# Altium PCB UST001_UUTurbidityControl.PcbDoc
Units mm, origin at the board's own origin, x right, y up, seen from the top; angles counter-clockwise.
Board outline 25 x 40 mm, 4 copper layers (Top Layer, PWR, GND, Bottom Layer), stack 1.449 mm thick; 69 components, 41 nets, 206 pads, 110 vias.
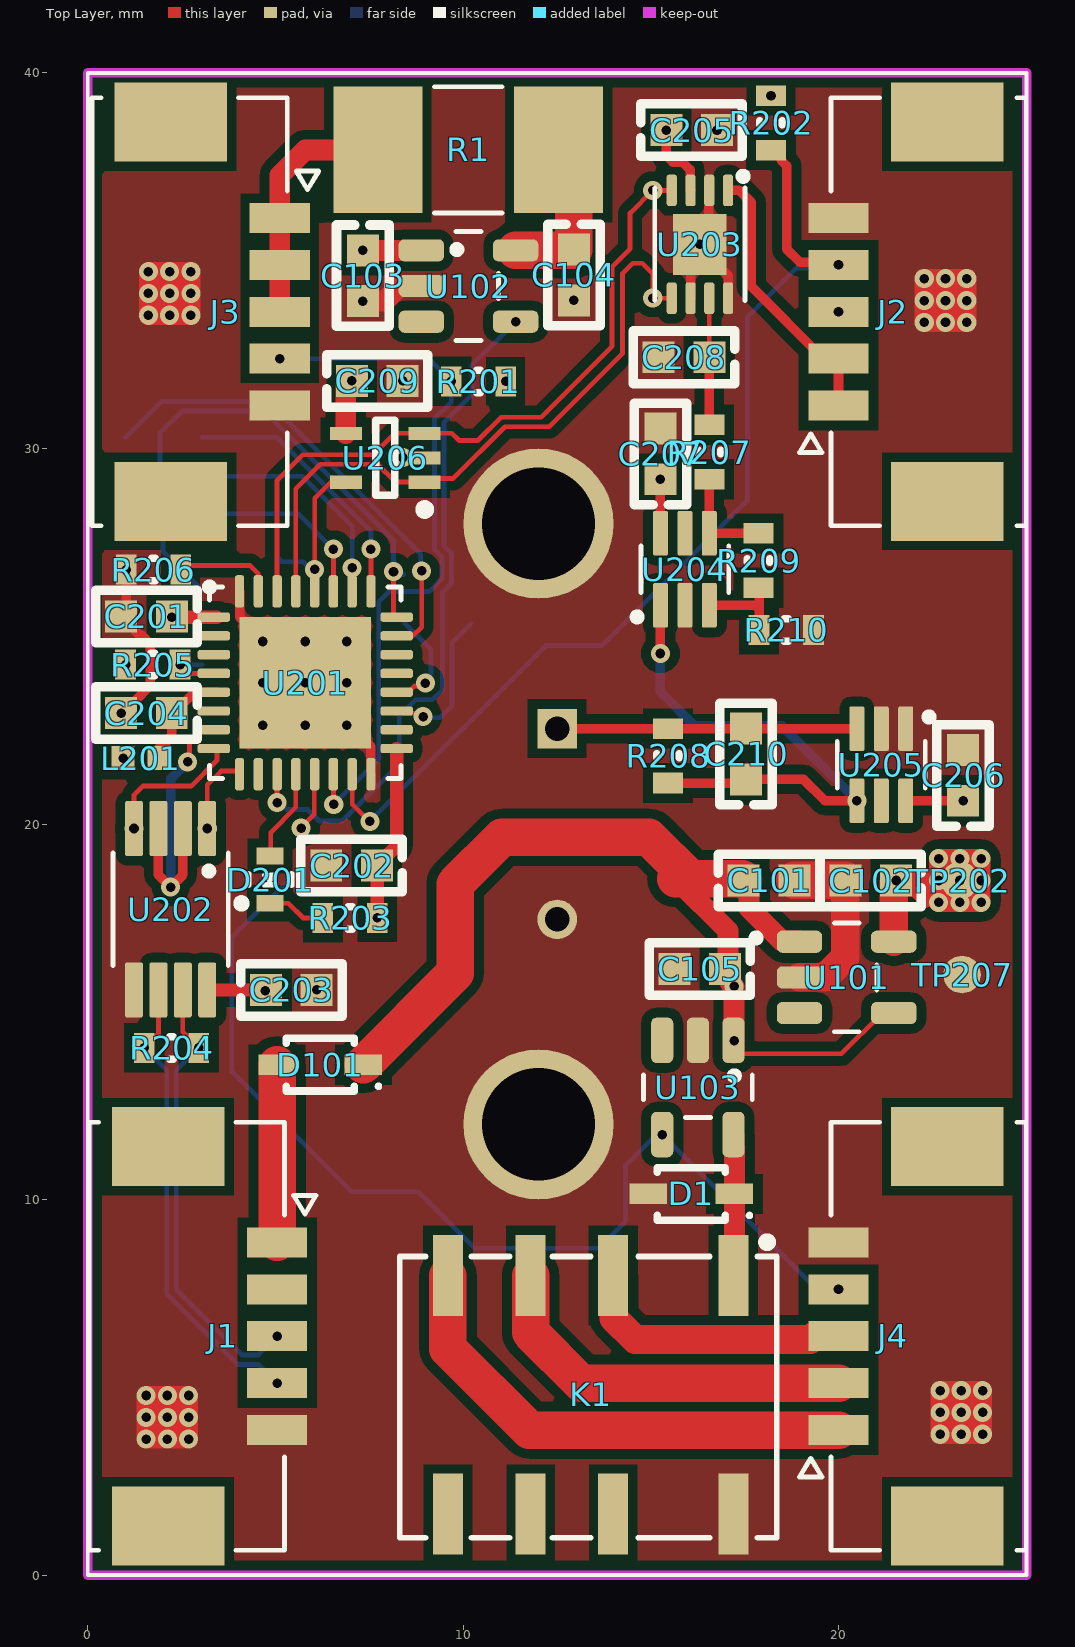
[diagram p0: Top Layer view]
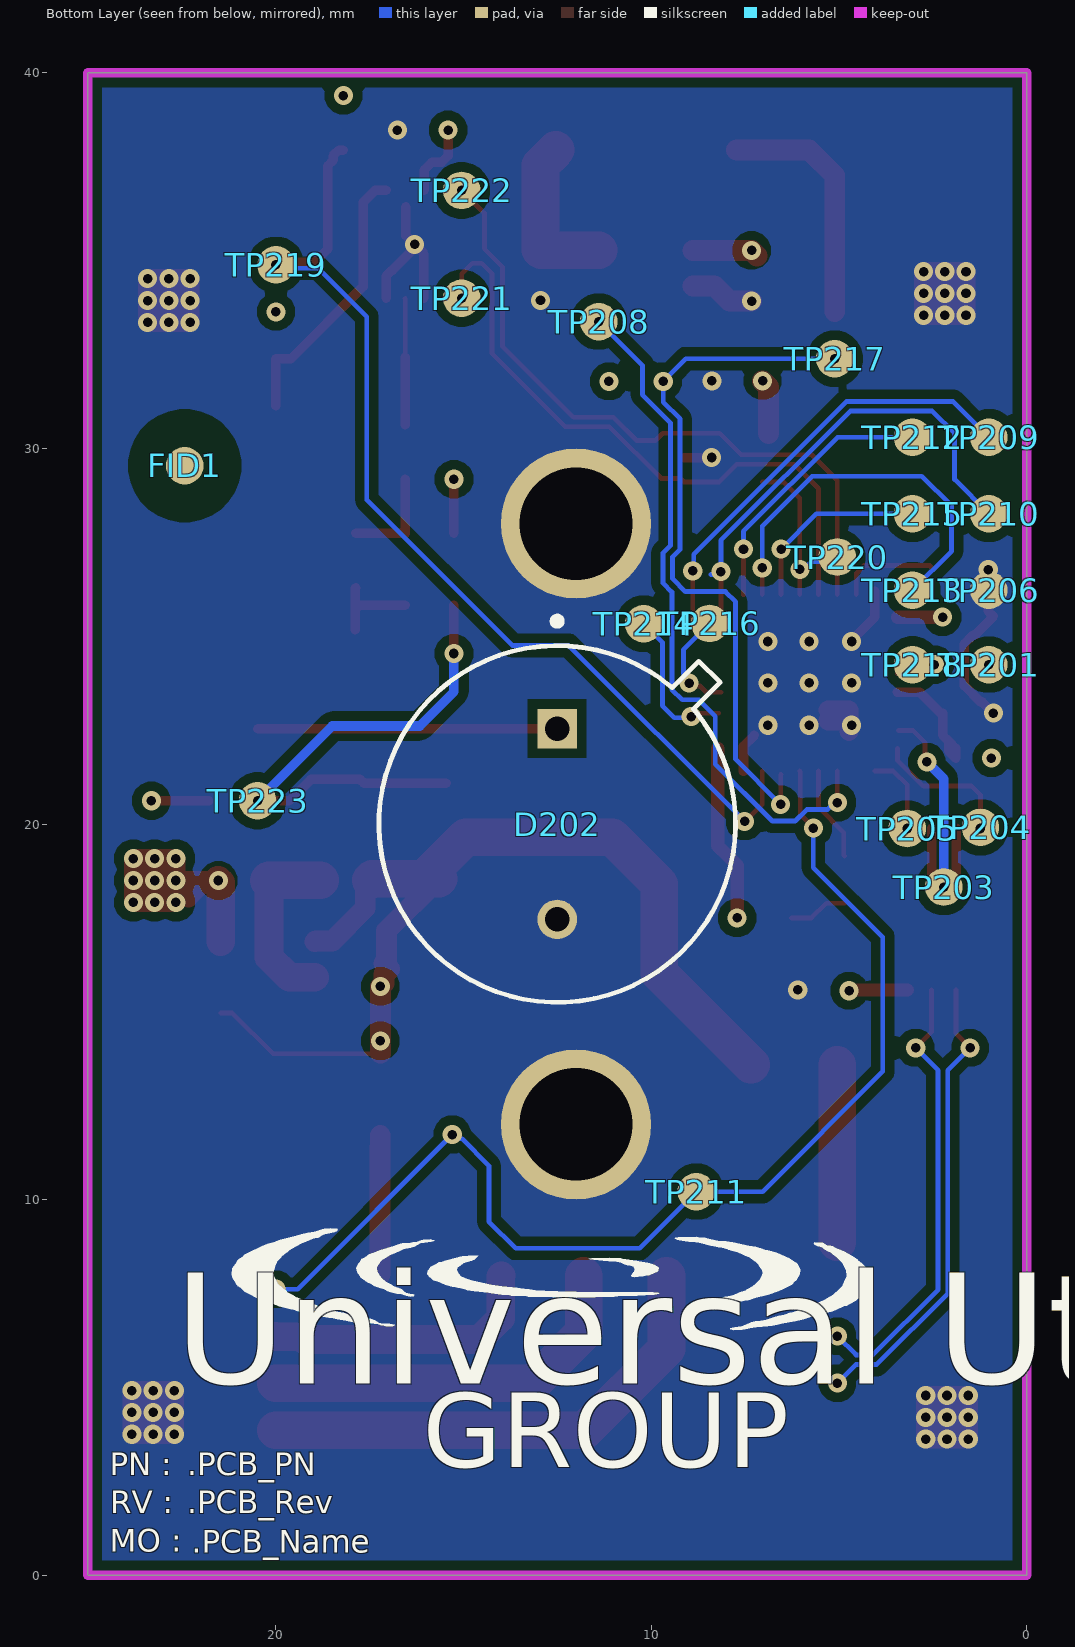
[diagram p1: Bottom Layer view, seen from below]
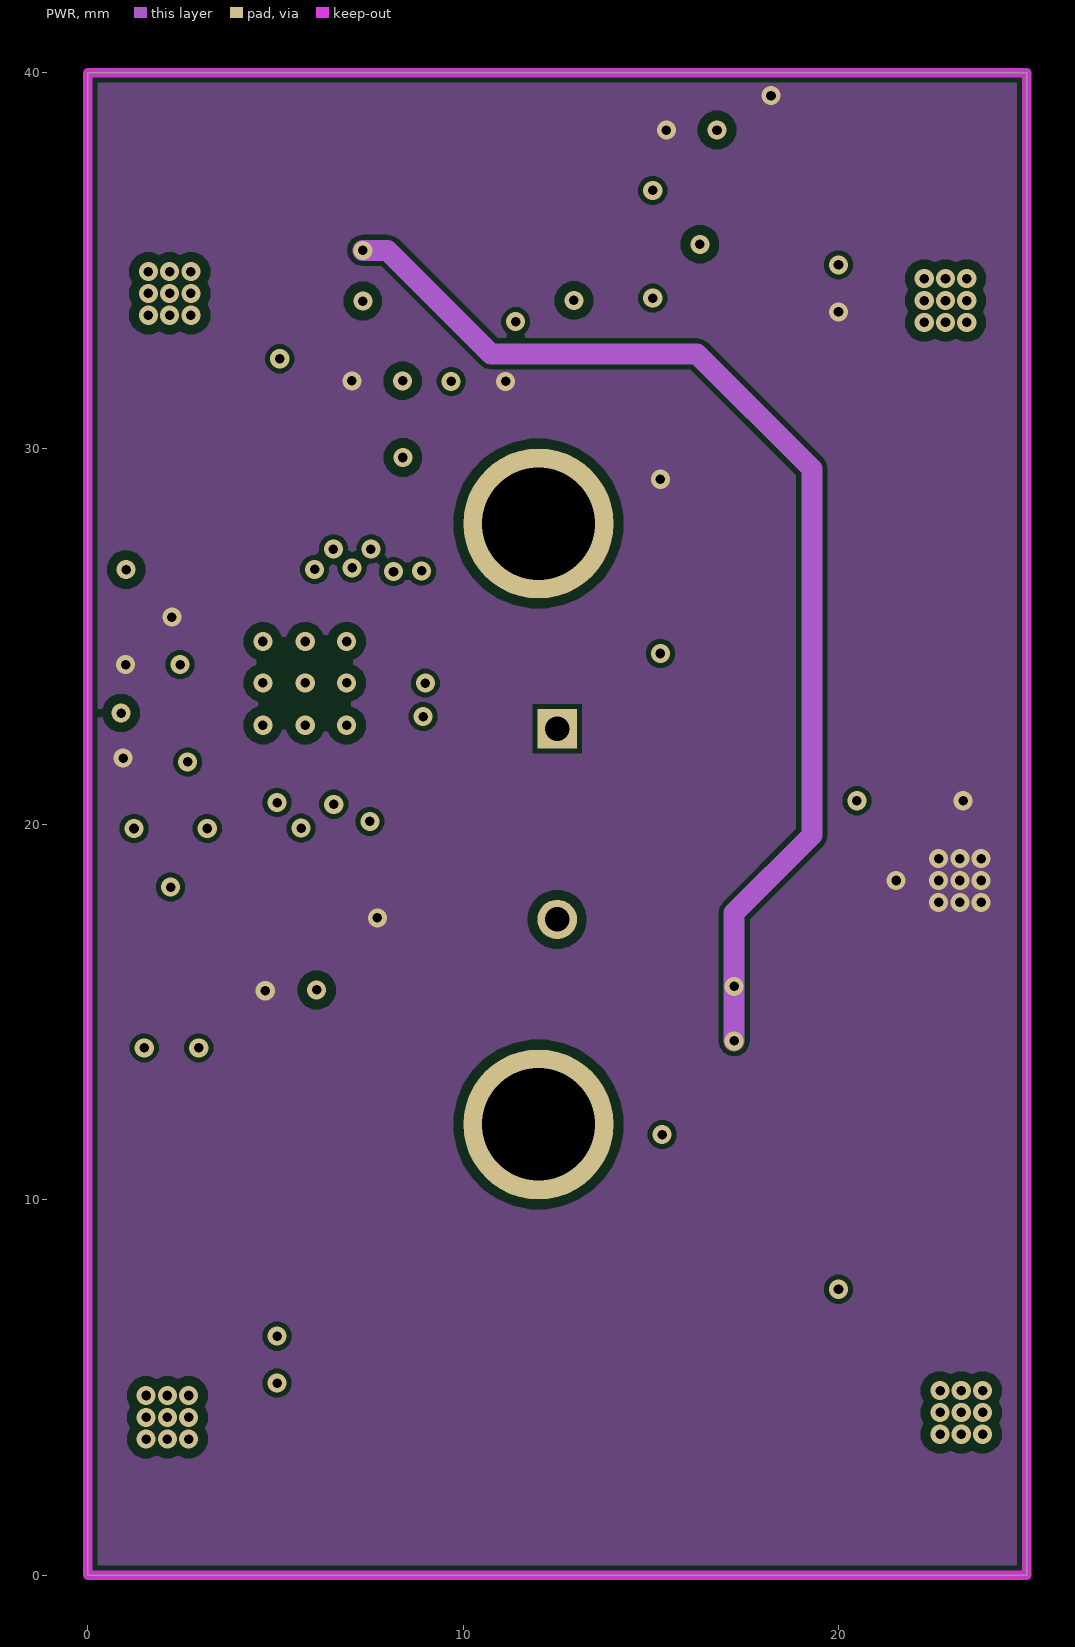
[diagram p2: PWR]
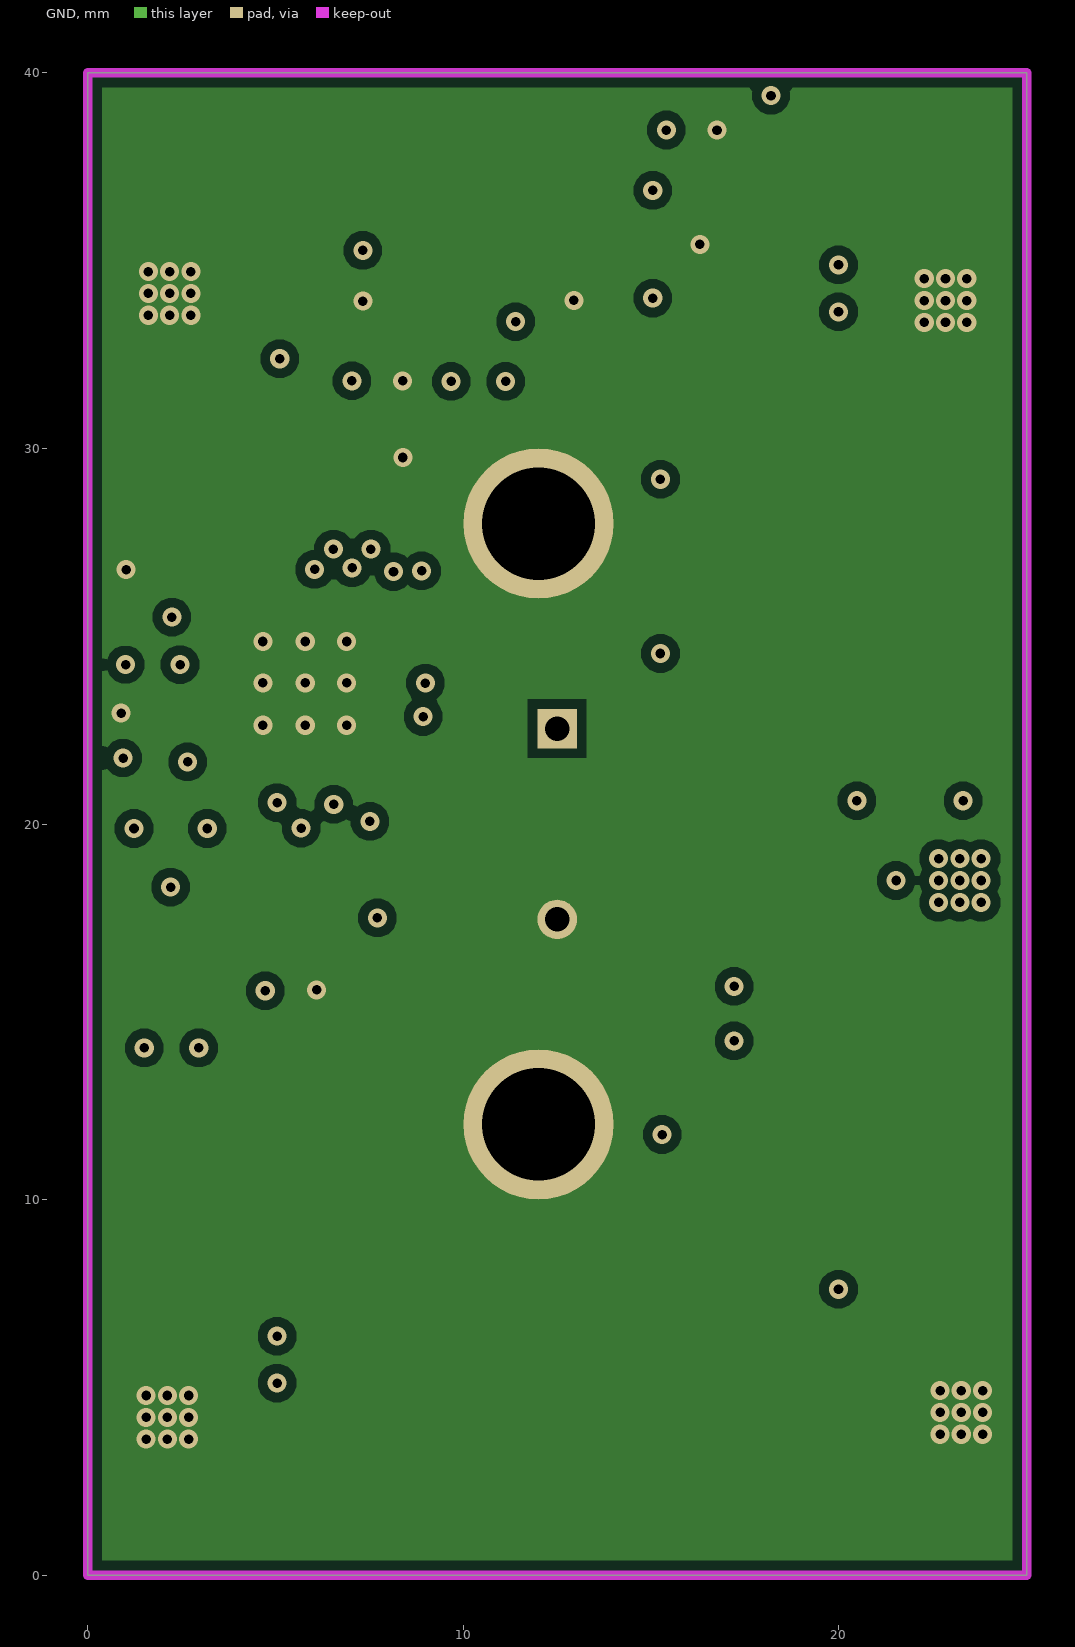
[diagram p3: GND]
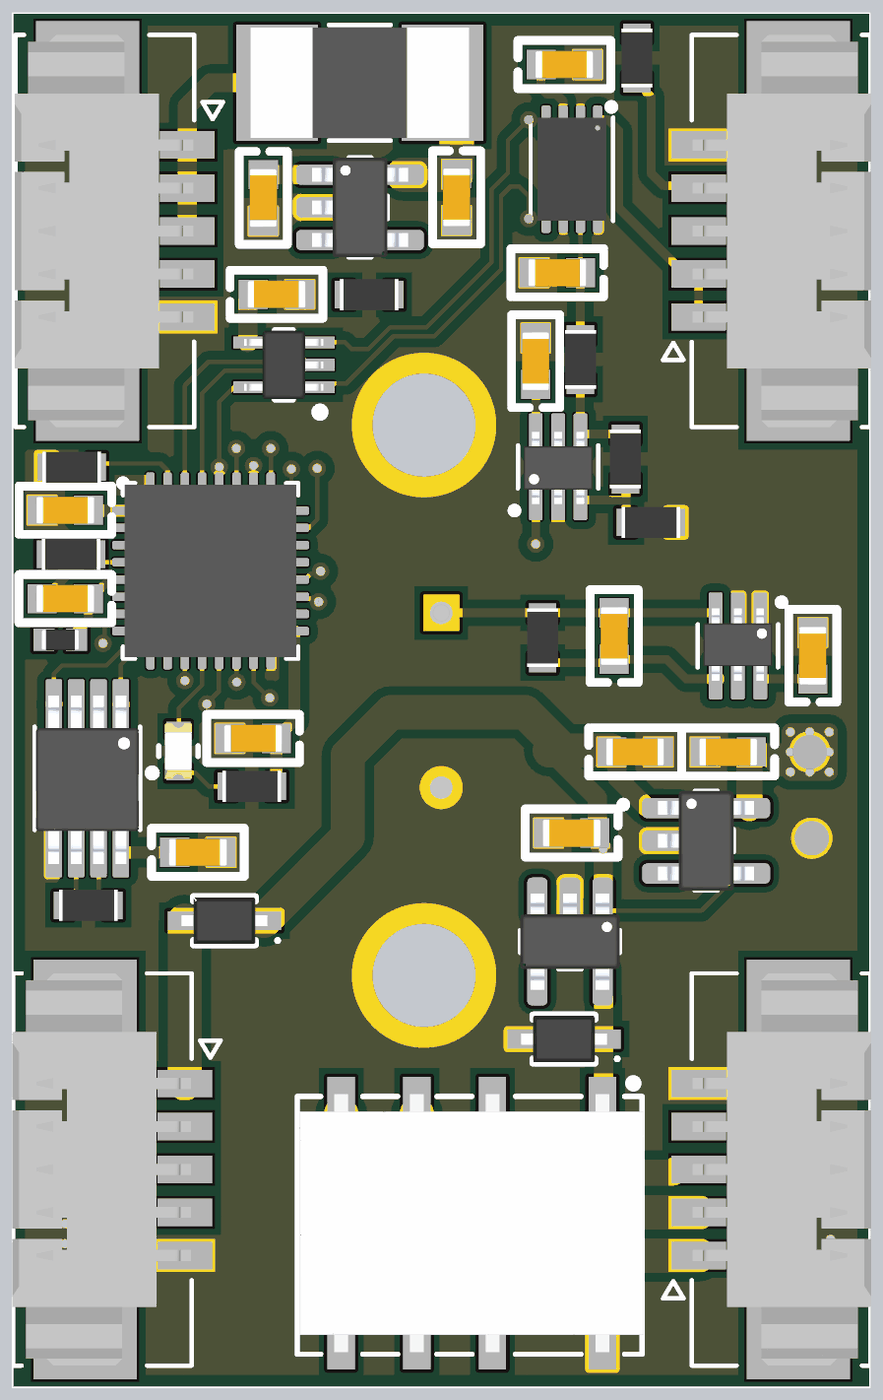
[diagram p4: 3D render of the assembled board from above, using the file's embedded part models]

## Layer stack, top to bottom
Top Solder: solder mask 0.0254, Solder Resist, Dk 3.5
Top Layer: signal copper 0.0356
Dielectric 1: prepreg 0.0711, PP-006, Dk 4.1
PWR: signal copper 0.0178
Core: core 1.2, FR-4, Dk 3.95
GND: signal copper 0.0178
Dielectric 2: prepreg 0.0711, PP-006, Dk 4.1
Bottom Layer: signal copper 0.0356
Bottom Solder: solder mask 0.0254, Solder Resist, Dk 3.5

## Board outline
0,0 0,40 25,40 25,0

## Design rules (kind name [scope] priority, off if disabled: settings)
Clearance Clearance_FID [HasPad('FID*')] p1: gap=1 ignorepadtopadclearanceinfootprint=FALSE except(0: Arc-Hole Track-Hole SMDPad-Hole THPad-Hole Via-Hole Fill-Hole Poly-Hole Region-Hole Text-Hole)
Clearance Clearance_Polygon [InNamedPolygon('DGND')] p2: gap=0.254 ignorepadtopadclearanceinfootprint=FALSE
Clearance Clearance_IC [HasPad('C*') or  HasPad('U*') or HasPad('J*')] p3: gap=0.127 ignorepadtopadclearanceinfootprint=FALSE except(0: Arc-Hole Track-Hole SMDPad-Hole THPad-Hole Via-Hole Fill-Hole Poly-Hole Region-Hole Text-Hole)
Clearance Clearance_GND [InNet('AGND') or InNet('DGND')  or InNamedPolygon('DGNDP')] p4: gap=0.254 ignorepadtopadclearanceinfootprint=FALSE except(0: Arc-Hole Track-Hole SMDPad-Hole THPad-Hole Via-Hole Fill-Hole Poly-Hole Region-Hole Text-Hole)
Clearance [All] p5: gap=0.127 ignorepadtopadclearanceinfootprint=FALSE except(0: Arc-Hole Track-Hole SMDPad-Hole THPad-Hole Via-Hole Fill-Hole Poly-Hole Region-Hole Text-Hole)
DiffPairsRouting DiffPairsRouting_1 [All] p2: maxlimit=0.254 minlimit=0.254 mostfreqgap=0.254 toplayer_minwidth=0.381 toplayer_maxwidth=0.381 toplayer_prefwidth=0.381 midlayer1_minwidth=0.381 midlayer1_maxwidth=0.381 midlayer1_prefwidth=0.381 midlayer2_minwidth=0.381 midlayer2_maxwidth=0.381 midlayer2_prefwidth=0.381 bottomlayer_minwidth=0.381 bottomlayer_maxwidth=0.381 bottomlayer_prefwidth=0.381 maxuncoupledlength=12.7
FanoutControl Fanout_LCC [IsLCC] p1: bgadir=Out bgaviamode=Centered fanoutstyle=Auto fanoutdirection=Alternating viagrid=0.025 // Fanout_LCC (Default Rule)
FanoutControl Fanout_SOIC [IsSOIC] p2: bgadir=Out bgaviamode=Centered fanoutstyle=Auto fanoutdirection=Alternating viagrid=0.025 // Fanout_SOIC (Default Rule)
FanoutControl Fanout_BGA [IsBGA] p3: bgadir=Out bgaviamode=Centered fanoutstyle=Auto fanoutdirection=Alternating viagrid=0.025 // Fanout_BGA (Default Rule)
FanoutControl Fanout_Default [All] p4: bgadir=Out bgaviamode=Centered fanoutstyle=Auto fanoutdirection=Alternating viagrid=0.025 // Fanout_Default (Default Rule)
FanoutControl Fanout_Small [(CompPinCount < 5)] p5: bgadir=Out bgaviamode=Centered fanoutstyle=Auto fanoutdirection=OutThenIn viagrid=0.025 // Fanout_Small (Default Rule)
HoleToHoleClearance [All] p1: gap=0.25 allowstackedmicrovias=TRUE
MinimumAnnularRing [All] p1: minimumring=0.05
MinimumSolderMaskSliver [All] p1: minsoldermaskwidth=0.05
PasteMaskExpansion PasteMaskExpansion_1 [All] p2: expansion=0
PolygonConnect [All] p1: connectstyle=Direct reliefconductorwidth=0.254 reliefentries=4 polygonreliefangle="90 Angle" airgapwidth=0.254
RoutingVias [All] p1: holewidth=0.711 width=1.27 viastyle="Through Hole" minholewidth=0.15 minwidth=0.3 maxholewidth=0.711 maxwidth=1.27
SilkToBoardRegionClearance SilkToBoardRegionClearance_3 [All] p2:
SilkToBoardRegionClearance SilkToBoardRegionClearance_2 [All] p3:
SilkToBoardRegionClearance SilkToBoardRegionClearance_1 [All] p4:
SilkToSolderMaskClearance [IsPad] p1: minsilkscreentomaskgap=0.12 clearancetoexposedcopper=TRUE
SolderMaskExpansion [All] p1: expansion=0.102 istentingtop=FALSE
SolderMaskExpansion SolderMaskExpansion_1 [All] p2: expansion=0.102 istentingtop=FALSE
Width [All] p1: maxlimit=5.56 minlimit=0.127 preferedwidth=0.254
22 further rules are at their usual default settings.

## Classes and differential pairs
component class MainControl: C201 C202 C203 C204 C205 C206 C207 C208 C209 C210 D201 D202 L201 R201 R202 R203 R204 R205 R206 R207 R208 R209 R210 TP201 TP202 TP203 TP204 TP205 TP206 TP207 TP208 TP209 TP210 TP211 TP212 TP213 TP214 TP215 TP216 TP217 TP218 TP219 TP220 TP221 TP222 TP223 U201 U202 U203 U204 U205 U206
component class 0_Overview: D1 FID1 J1 J2 J3 J4 K1 PCB1 R1
component class PowerSystem: C101 C102 C103 C104 C105 D101 U101 U102 U103

## Components (designator, comment, footprint, x,y, rotation, side; value= is the part's Value field where it differs from the comment)
C101 "0.1uF" C_0603 18.14,18.497 r0 top
C102 "0.1uF" C_0603 20.85,18.495 r180 top
C103 "0.1uF" C_0603 7.322,34.601 r270 top
C104 "0.1uF" C_0603 12.946,34.62 r270 top
C105 "0.1uF" C_0603 16.295,16.14 r180 top
C201 "0.1uF" C_0603 1.562,25.527 r180 top
C202 "0.1uF" C_0603 7.025,18.89 r180 top
C203 "0.1uF" C_0603 5.42,15.58 r0 top
C204 "0.1uF" C_0603 1.561,22.954 r180 top
C205 "0.1uF" C_0603 16.08,38.48 r0 top
C206 "0.1uF" C_0603 23.309,21.295 r90 top
C207 "0.1uF" C_0603 15.25,29.855 r90 top
C208 "1uF" C_0603 15.875,32.428 r180 top
C209 "0.1uF" C_0603 7.707,31.802 r0 top
C210 "100pF" C_0603 17.53,21.865 r90 top
D1 "SD103AWS" SOD323 16.07,10.15 r180 top
D101 "SD103AWS" SOD323 6.19,13.59 r180 top
D201 "150060VS75000" LED_0VS75000_WRE 4.853,18.521 r90 top
D202 "BPX 61" TO254P950H570-2 12.5,20 r270 bottom
FID1 "FIDUCIAL" FID 22.42,29.54 r180 bottom value="Non SE"
J1 "0532610571" MOLEX_532610571 2.64,6.36 r270 top
J2 "0532610571" MOLEX_532610571 22.39,33.64 r90 top
J3 "0532610571" MOLEX_532610571 2.71,33.64 r270 top
J4 "0532610571" MOLEX_532610571 22.39,6.36 r90 top
K1 "HFD4/3-S1R" RELAY_HFD4/12-SR 13.39,4.8 r270 top
L201 "10uH" L_0402 1.415,21.757 r0 top
R1 "3R3" R_2512 10.13,37.95 r180 top
R201 "150k" R_0603 10.401,31.786 r180 top
R202 "150k" R_0603 18.193,38.671 r270 top
R203 "220R" R_0603 6.985,17.5 r0 top
R204 "120R" R_0603 2.228,14.039 r180 top
R205 "150k" R_0603 1.73,24.243 r0 top
R206 "0" R_0603 1.746,26.774 r0 top
R207 "20k" R_0603 16.55,29.905 r90 top
R208 "1M" R_0603 15.45,21.815 r90 top
R209 "20k" R_0603 17.86,27.014 r270 top
R210 "20k" R_0603 18.599,25.169 r0 top
TP201 "" TP_Testpoint 1.005,24.243 r90 bottom
TP202 "" TP_Testpoint 23.222,18.495 r0 top
TP203 "" TP_Testpoint 2.205,18.32 r0 bottom
TP204 "" TP_Testpoint 1.23,19.91 r0 bottom
TP205 "" TP_Testpoint 3.18,19.88 r0 bottom
TP206 "" TP_Testpoint 1.005,26.227 r90 bottom
TP207 "" TP_Testpoint 23.28,15.99 r180 top
TP208 "" TP_Testpoint 11.393,33.376 r0 bottom
TP209 "" TP_Testpoint 1.005,30.298 r270 bottom
TP210 "" TP_Testpoint 1.005,28.262 r270 bottom
TP211 "" TP_Testpoint 8.797,10.209 r90 bottom
TP212 "" TP_Testpoint 3.041,30.298 r270 bottom
TP213 "" TP_Testpoint 3.041,26.227 r270 bottom
TP214 "" TP_Testpoint 10.196,25.333 r180 bottom
TP215 "" TP_Testpoint 3.041,28.262 r270 bottom
TP216 "" TP_Testpoint 8.44,25.34 r180 bottom
TP217 "" TP_Testpoint 5.11,32.39 r0 bottom
TP218 "" TP_Testpoint 3.041,24.243 r270 bottom
TP219 "" TP_Testpoint 19.99,34.89 r0 bottom
TP220 "" TP_Testpoint 5.04,27.11 r0 bottom
TP221 "" TP_Testpoint 15.045,34.002 r180 bottom
TP222 "" TP_Testpoint 15.045,36.872 r180 bottom
TP223 "" TP_Testpoint 20.48,20.62 r270 bottom
U101 "RT9069-33GB" SOT95P280X145-5N 20.207,15.915 r0 top
U102 "RT9069-33GB" SOT95P280X145-5N 10.138,34.326 r0 top
U103 "RT9069-33GB" SOT95P280X145-5N 16.245,12.985 r270 top
U201 "STM32L432KCU6" QFN50P500X500X60-33N 5.79,23.76 r0 top
U202 "SN65HVD77DGKR" SOP65P490X110-8N 2.205,17.73 r270 top
U203 "MCP3422A0-E/MC" SON50P200X300X100-9N 16.3,35.437 r270 top
U204 "OPA607IDCKR" SOT65P210X110-6N 15.9,26.784 r90 top
U205 "OPA607IDCKR" SOT65P210X110-6N 21.13,21.58 r270 top
U206 "24AA02HT-I/LT" SOT65P210X110-5N 7.92,29.75 r180 top

## Footprints (in the part's own frame and the unit in brackets; to place one, negate y for a bottom-side part, rotate by r counter-clockwise, add the part's x,y. Pads: shape width x height; smd on the part's side, far side on the other; paste and mask are expansions set on the pad)
C_0603 [mm] "Chip Capacitor, 2-Leads, Body 1.60x0.75mm, IPC Medium Density"
  rect 0.85x0.85 smd mask+0.03: 1(-0.675,0) 2(0.675,0)
  silkscreen extent -1.35,-0.7 1.35,0.7, body extent -0.85,-0.4 0.85,0.4, height 0.8
FID [mm]
  round 1 smd mask+1: ""(0,0)
L_0402 [mm] "Chip Inductor, 2-Leads, Body 1.00x0.50mm, IPC Medium Density"
  rect 0.61x0.64 smd: 1(-0.475,0) 2(0.475,0)
  body extent -0.55,-0.3 0.55,0.3, height 0.5
LED_0VS75000_WRE [mil]
  rect 17.5x28 smd: 1(-24.75,0) 2(24.75,0)
  silkscreen extent -29,-22 6,34, body extent -31,-16 32,16, height 28
MOLEX_532610571 [mm]
  rect 0.8x1.6 smd mask+0: 1(-2.5,2.4) 2(-1.25,2.4) 3(0,2.4) 4(1.25,2.4) 5(2.5,2.4)
  rect 2.1x3 smd mask+0: S1(-5.05,-0.5) S2(5.05,-0.5)
  silkscreen extent -5.7,-2.6 5.7,3.44, body extent -5.7,-2.63 5.7,2.57, height 3.55
QFN50P500X500X60-33N [mm]
  rrect54% 0.86x0.25 smd mask+0.05: 1(-2.435,1.75) 2(-2.435,1.25) 3(-2.435,0.75) 4(-2.435,0.25) 5(-2.435,-0.25) 6(-2.435,-0.75) 7(-2.435,-1.25) 8(-2.435,-1.75) 17(2.435,-1.75) 18(2.435,-1.25) 19(2.435,-0.75) 20(2.435,-0.25) 21(2.435,0.25) 22(2.435,0.75) 23(2.435,1.25) 24(2.435,1.75)
  rrect54% 0.25x0.86 smd mask+0.05: 9(-1.75,-2.435) 10(-1.25,-2.435) 11(-0.75,-2.435) 12(-0.25,-2.435) 13(0.25,-2.435) 14(0.75,-2.435) 15(1.25,-2.435) 16(1.75,-2.435) 25(1.75,2.435) 26(1.25,2.435) 27(0.75,2.435) 28(0.25,2.435) 29(-0.25,2.435) 30(-0.75,2.435) 31(-1.25,2.435) 32(-1.75,2.435)
  rect 3.5x3.5 smd paste-3 mask+0.05: 33(0,0)
  silkscreen extent -2.6,-2.55 2.55,2.6, body extent -2.5,-2.5 2.5,2.5, height 0.6
R_0603 [mm] "Chip Resistor, 2-Leads, Body 1.60x0.80mm, IPC High Density"
  rect 0.55x0.8 smd: 1(-0.725,0) 2(0.725,0)
  silkscreen extent -0.05,-0.3 0.05,0.3, body extent -0.85,-0.45 0.85,0.45, height 0.45
R_2512 [mm] "RES SMD 3.3 OHM 5% 3W 2512"
  rect 2.37x3.37 smd: 1(-2.405,0) 2(2.405,0)
  silkscreen extent -0.9,-1.68 0.9,1.68, body extent -3.17,-1.6 3.18,1.6, height 1.2
RELAY_HFD4/12-SR [mm] "Telecom Non Latching 12VDC DPDT SMD Relays RoHS"
  rect 2.15x0.8 smd: 1(-3.175,3.8) 2(-3.175,0.6) 3(-3.175,-1.6) 4(-3.175,-3.8) 5(3.175,-3.8) 6(3.175,-1.6) 7(3.175,0.6) 8(3.175,3.8)
  silkscreen extent -4.17,-5.08 3.81,4.95, body extent -3.75,-5 3.75,5, height 5.67
SOD323 [mm] "SODFL, 2-Leads, Body 1.25x2.50mm, IPC Low Density"
  rect 1x0.55 smd: 1(-1.15,0) 2(1.15,0)
  silkscreen extent -1.6,-0.7 0.9,0.7, body extent -1.25,-0.67 1.25,0.67, height 1.1
SON50P200X300X100-9N [mm]
  rrect50% 0.84x0.27 smd mask+0.05: 1(-1.435,0.75) 2(-1.435,0.25) 3(-1.435,-0.25) 4(-1.435,-0.75) 5(1.435,-0.75) 6(1.435,-0.25) 7(1.435,0.25) 8(1.435,0.75)
  rect 1.625x1.425 smd paste-2 mask+0.05: 6(0,0)
  silkscreen extent -1.91,-1.2 1.5,1.25, body extent -1.5,-1 1.5,1, height 0.94
SOP65P490X110-8N [mm]
  rrect25% 1.47x0.48 smd mask+0.05: 1(-2.15,0.975) 2(-2.15,0.325) 3(-2.15,-0.325) 4(-2.15,-0.975) 5(2.15,-0.975) 6(2.15,-0.325) 7(2.15,0.325) 8(2.15,0.975)
  silkscreen extent -1.5,-1.54 1.5,1.54, body extent -2.41,-1.5 2.49,1.5, height 1.1
SOT65P210X110-5N [mm] "SOT23, 5-Leads, Body 2.00x2.10mm, Pitch 0.65mm, IPC Medium Density"
  rect 0.85x0.35 smd mask+0.05: 1(-1.05,0.65) 2(-1.05,0) 3(-1.05,-0.65) 4(1.05,-0.65) 5(1.05,0.65)
  silkscreen extent -1.18,-1 0.25,1.5, body extent -1.15,-1 1.15,1, height 1.1
SOT65P210X110-6N [mm]
  rrect25% 1.19x0.4 smd mask+0.05: 1(-0.96,0.65) 2(-0.96,0) 3(-0.96,-0.65) 4(0.96,-0.65) 5(0.96,0) 6(0.96,0.65)
  silkscreen extent -1.37,-1.17 0.63,1.37, body extent -1.08,-1 1.02,1, height 1.1
SOT95P280X145-5N [mm]
  rrect50% 1.21x0.59 smd: 1(-1.255,0.95) 2(-1.255,0) 3(-1.255,-0.95) 4(1.255,-0.95) 5(1.255,0.95)
  silkscreen extent -2.51,-1.45 0.8,1.45, body extent -1.4,-1.45 1.4,1.45, height 1.45
TO254P950H570-2 [mm]
  round 1.05 hole 0.65: A(2.54,0)
  rect 1.05x1.05 hole 0.65: C(-2.54,0)
  silkscreen extent -5.5,-4.75 4.75,4.75, body extent -4.57,-4.57 4.57,4.57, height 3.5
TP_Testpoint [mm] "Size 1 mm"
  round 1 smd: 1(0,0)

## Part data
C101 C102 C103 C104 C105 C201 C202 C203 C204 C205 C206 C207 C209: library part C_Capacitor, "CAP CER 0.1UF 50V X7R 0603", Manufacturer=KEMET, PartNumber=C0603C104K5RACTU, Value2=50V, PackageReference=0603, PartID=399-5089-1-ND
C208: library part C_Capacitor, "CAP CER 0603 1UF 6.3V X7R 5%", Manufacturer=KEMET, PartNumber=C0603X105J9RAC7867, Value2=6.3V, Value3=X7R, PackageReference=0603, PartID=399-17700-1-ND
C210: library part C_Capacitor, "CAP CER 100PF 100V X7R 0603", Manufacturer="AVX Corporation", PartNumber=06031C101JAT2A, Value2=100V, Value3=±5%, PackageReference=0603, PartID=478-12671-1-ND
D1 D101: library part D_PW_SD103AWS, "DIODE SCHOTTKY 40V 2A 0603", Manufacturer="Slkor(SLKORMICRO Elec.)", PackageReference=SOD-323, PartID=C513472, PartNumber=SD103AWS
D201: library part D_LED_150060BS75000, "LED BLUE CLEAR 0603 SMD", Manufacturer="Wurth Electronics", PackageReference=0603, PartID=732-4980-1-ND, PartNumber=150060VS75000
D202: library part D_PD_BPX61, "SENSOR PHOTODIODE 850NM TO39-2", Manufacturer="OSRAM Opto Semiconductors Inc.", PartID=475-1350-ND, PartNumber="BPX 61"
FID1: library part FID_FIDUCIAL, "Fiducial", Manufacturer=mindek30@gmail.com, PartNumber=UST001_A1, Value2="Non SE", PackageReference="Non SE", PartID=A1, Value3="Non SE"
J1 J2 J3 J4: library part CON_5P_532610571, "CONN HEADER SMD R/A 5POS 1.25MM", Manufacturer=Molex, Value2=AFC12-S05DCC-00, PackageReference=5P, PartID=WM7623CT-ND, PartNumber=0532610571
K1: library part SW_RELAY_HFD4/12-SR, "Telecom Non Latching 3VDC DPDT SMD Relays RoHS", Manufacturer="Xiamen Hongfa Electroacoustic", PartID=C143232, PartNumber=HFD4/3-S1R
L201: library part L_Inductor, "10µH Shielded Multilayer Inductor 250mA 1.05Ohm 0603 (1608 Metric)", Manufacturer="TDK Corporation", PartNumber=MLZ1608M100WT000, PackageReference=0603, PartID=445-6389-1-ND
R1: library part R_Resister, "RES SMD 3.3 OHM 5% 3W 2512", Manufacturer=Vishay, PartNumber=35223R3JT, Value2=3W, Value3=5%, PackageReference=2512, PartID=A121247CT-ND
R201 R202 R205: library part R_Resister, "RES SMD 150K OHM 1% 1/10W 0603", Manufacturer="Vishay Dale", PartNumber=CRCW0603150KFKEAC, Value2=0.1W, PackageReference=0603, PartID=541-4034-1-ND
R203: library part R_Resister, "RES SMD 220 OHM 1% 1/10W 0603", Manufacturer="Vishay Dale", PartNumber=CRCW0603220RFKEAC, Value2=0.1W, PackageReference=0603, PartID=541-4047-1-ND
R204: library part R_Resister, "RES SMD 120 OHM 1% 1/3W 0603", Manufacturer="Vishay Dale", PartNumber=CRCW0603120RFKEAHP, Value2=0.333W, PackageReference=0603, PartID=541-120SCT-ND
R206: library part R_Resister, "RES SMD 0 OHM JUMP 1/10W 0603", Manufacturer="Vishay Dale", PartNumber=CRCW06030000Z0EBC, Value2=0.1W, PackageReference=0603, PartID=541-4013-1-ND
R207 R209 R210: library part R_Resister, "RES SMD 20K OHM 5% 1/4W 0603", Manufacturer="Panasonic Electronic Components", PartNumber=ERJ-PA3J203V, Value2=0.1W, PackageReference=0603, PartID=P20KBZCT-ND
R208: library part R_Resister, "RES SMD 1M OHM 5% 1/10W 0603", Manufacturer=YAGEO, PartNumber=AC0603JR-071ML, Value2=0.1W, Value3=5%, PackageReference=0603, PartID=311-1MLECT-ND
TP201 TP202 TP203 TP204 TP205 TP206 TP207 TP208 TP209 TP210 TP211 TP212 TP213 TP214 TP215 TP216 TP217 TP218 TP219 TP220 TP221 TP222 TP223: library part TP_TestPoint, "TestPoint"
U101 U102 U103: library part IC_LDO_RT9069-33GB, "200mA 360mV@(10mA) Fixed 3.3V~3.3V Positive 1 36V SOT-23-5 Linear Voltage Regulators (LDO) ROHS", Manufacturer="Richtek Tech", PackageReference=SOT-23-5, PartID=C147969, PartNumber=RT9069-33GB
U201: library part IC_MCU_STM32L432, "IC MCU 32BIT 256KB FLSH 32UFQFPN", Manufacturer=STMicroelectronics, PartID=497-16578-ND, PartNumber=STM32L432KCU6
U202: library part IC_TRAN_SN65HVD78DGK, "IC TRANSCEIVER FULL 1/1 8VSSOP", Manufacturer="Texas Instruments", PackageReference=VSSOP-8, PartID=296-40528-1-ND, PartNumber=SN65HVD77DGKR
U203: library part IC_ADC_MCP3422A0, "IC ADC 18BIT SIGMA-DELTA 8DFN", Manufacturer="Microchip Technology", PackageReference=DFN-8, PartID=MCP3422A0-E/MC-ND, PartNumber=MCP3422A0-E/MC
U204 U205: library part IC_OPAMP_OPA607, "LOW POWER, PRECISION, 50 MHZ DEC", Manufacturer="Texas Instruments", PackageReference=SC-70-6, PartID=296-OPA607IDCKRCT-ND, PartNumber=OPA607IDCKR
U206: library part IC_MEM_24AA02HT, "IC EEPROM 2KBIT I2C SC70-5", Manufacturer="Microchip Technology", PackageReference=SC-70-5, PartID=24AA02HT-I/LTCT-ND, PartNumber=24AA02HT-I/LT

## Free pads (board coordinates)
  round 4 hole 3: ""(12,12) ""(12,28)

## Via types
v1: diameter 0.508, hole 0.254, Top Layer to Bottom Layer, tented both sides, 110 vias

## Nets (pads, with @x,y where several pads share a name; then routed paths per layer and width w, separated by ;. In a path a pad name is that pad's centre, name@x,y a point inside that pad or via, vN(x,y) a via of type N, cw(c..) or ccw(c..) an arc to the next point about the centre after c; other vN are vias at no path point)
+3.3RELAY: D1.1 K1.1 U103.5 | length 3.7
  Top Layer w0.556: U103.5@17.212,11.705 17.212,11.403 17.22,11.395 K1.1@17.22,8.005
+3.3VD: C102.1 C201.1 C202.1 C203.1 C205.1 C206.1 C207.1 C209.1 J2.3 L201.1 R201.1 R202.1 R203.2 R205.1 TP201.1 TP202.1 U101.5 U201.1 U201.17 U202.8 U203.3 U204.6 U205.6 U206.4 | length 26
  Top Layer w0.254: U204.6 v1(15.25,29.18) ; v1(15.405,38.48) 15.405,37.795 15.577,37.623 15.837,37.623 16.042,37.418 16.042,36.88 U203.3 ; U205.6 v1(23.309,20.62)
  Top Layer w0.356: v1(2.237,25.51) U201.1 U201.1@3.44,25.51 ; U202.8 C203.1 ; v1(7.71,17.5) 7.705,17.505 7.705,18.885 C202.1 7.947,19.137 8.225,19.415 U201.17
  Top Layer w0.508: v1(21.525,18.495) C102.1@21.86,18.495 ; 22.323,18.032 C102.1@21.86,18.495 ; C102.1@21.86,18.495 v1(22.656,18.495) ; 22.656,18.205 TP202.1@23.222,18.205 ; 22.656,18.205 v1(22.656,18.495) ; 22.656,18.205 v1(22.656,17.914) v1(23.222,17.914) ; v1(22.656,18.495) 22.656,18.786 ; v1(22.656,18.495) v1(23.222,18.495) ; 22.656,18.786 23.787,18.786 ; 22.656,18.786 v1(22.656,19.077) v1(23.222,19.077) v1(23.787,19.077) 23.787,18.786 ; v1(23.222,17.914) TP202.1@23.222,18.205 ; v1(23.222,17.914) v1(23.787,17.914) 23.787,18.205 ; TP202.1@23.222,18.205 23.787,18.205 ; TP202.1@23.222,18.205 v1(23.222,18.495) ; v1(23.222,18.495) v1(23.787,18.495) ; 23.787,18.205 v1(23.787,18.495) ; v1(23.787,18.495) 23.787,18.786
  Top Layer w0.556: U206.4 6.87,31.64 v1(7.032,31.802)
  Top Layer w0.762: U101.5 21.462,18.433 v1(21.525,18.495)
  Bottom Layer w0.356: v1(1.005,24.243) TP201.1@1.005,24.261 ; v1@2.237,25.492 v1(2.237,25.51)
  other v1: 4.725,15.56 0.94,21.757 11.126,31.786 19.99,33.64 18.193,39.396
+3.3VLAMP: C104.1 R1.1 U102.5 | length 4.4
  Top Layer w1: U102.5 12.927,35.276 C104.1 12.946,37.539 R1.1
+MVP: C101.1 C103.1 C105.1 D101.1 U101.1 U101.4 U102.1 U103.1 | length 59.9
  Top Layer w0.127: U103.1 v1(17.21,14.225) 17.21,14.09 17.42,13.88 20.067,13.88 21.152,14.965 U101.4
  Top Layer w0.556: C103.1@7.175,35.129 v1(7.322,35.276) U102.1 ; 15.66,18.54 17.044,17.156 C105.1@17.044,16.213 ; C105.1@17.117,16.287 C105.1@17.044,16.213 ; U103.1@17.21,13.895 U103.1@17.21,14.09 ; v1(17.21,14.225) 17.21,15.667 17.117,15.76 17.117,15.993 C105.1 C105.1@17.044,16.213 ; C101.1 17.612,18.35 17.612,17.758 18.488,16.882 18.935,16.882 U101.1
  Top Layer w1: D101.1 9.78,16.03 9.78,18.4 11.03,19.65 14.94,19.65 16.05,18.54 ; 15.66,18.54 16.05,18.54 ; C101.1 17.422,18.54 16.05,18.54
  PWR w0.556: v1(7.322,35.276) 7.984,35.276 10.74,32.52 16.22,32.52 19.28,29.46 19.28,19.7 17.21,17.63 v1(17.21,15.675) v1(17.21,14.225)
+VIN: D101.2 J1.1 | length 4.7
  Top Layer w1: J1.1 D101.2
ADC_Ch0: J2.1 J2.2 U203.1 | length 7.4
  Top Layer w0.254: U203.1 17.349,36.872 17.67,36.551 17.67,34.31 19.59,32.39 J2.2 J2.1
ADC_Ch1: C208.1 R207.2 U203.7 | length 3.4
  Top Layer w0.127: C208.1 U203.7 U203.7@16.563,33.989
  Top Layer w0.254: R207.2 C208.1
ADC_MOD_Ch0: J3.4 R201.2 TP217.1 U201.14 | length 19
  Top Layer w0.127: U201.14 6.545,21.32 6.545,20.529 v1(6.55,20.525)
  Bottom Layer w0.127: v1(5.11,32.39) 9.072,32.39 v1(9.676,31.786) 9.676,31.235 9.23,30.789 9.23,27.311 9.428,27.112 9.428,26.528 9.09,26.19 8.02,26.19 7.749,25.92 7.749,21.724 v1@6.555,20.529
ADC_MOD_Ch1: J2.4 R202.2 TP219.1 U201.15 | length 27.5
  Top Layer w0.127: U201.15@7.04,21.41 7.04,20.52 7.49,20.07 v1(7.51,20.07)
  Top Layer w0.254: R202.2 18.318,37.946 18.466,37.798 18.466,37.673 18.61,37.529 18.61,35.31 18.958,34.962 19.918,34.962 v1(19.99,34.89)
  Bottom Layer w0.127: v1(7.51,20.07) 12.19,24.75 13.69,24.75 17.57,28.63 17.57,33.51 18.86,34.8 19.9,34.8 v1(19.99,34.89)
AN_EN: U201.10
DGND: C101.2 C102.2 C103.2 C104.2 C105.2 C201.2 C202.2 C203.2 C204.2 C205.2 C206.2 C207.2 C208.2 C209.2 D1.2 D202.A J1.5 J2.5 J3.5 J4.5 K1.8 pad. R206.1 R210.2 TP206.1 TP207.1 U101.2 U102.2 U103.2 U201.16 U201.32 U201.33 U202.5 U203.2 U203.6 U203.8 U204.2 U205.1 U205.2 U206.2 | length 55.5
  Top Layer w0.254: v1(0.886,22.954) 1.184,23.252 1.228,23.252 1.661,23.685 1.661,24.801 1.438,25.024 1.39,25.024 C201.2 1.021,25.661 v1(1.021,26.774) ; U201.32 4.04,25.51 4.66,24.89 v1(4.66,24.86) ; U201.33@7.25,22.36 7.54,22.07 7.54,21.41 U201.16@7.535,21.405 ; v1(8.39,29.76) v1(8.39,29.76) 9.131,29.759 U206.2@9.132,29.758 ; U203.6@16.05,34.002 16.05,35.187 v1(16.3,35.437) ; 16.53,36.44 16.53,35.668 v1(16.3,35.437) ; U203.8 17.05,34.603 16.901,34.752 16.885,34.752 16.3,35.337 v1(16.3,35.437)
  Top Layer w0.508: U201.33@4.727,22.459 U201.33@4.727,22.75 ; U201.33@5.293,22.75 U201.33@4.727,22.75 ; U201.33@5.293,23.041 4.727,23.041 U201.33@4.727,22.75 ; 1.554,3.909 v1(1.554,4.2) ; 1.554,3.909 v1(1.554,3.619) v1(2.12,3.619) ; 1.554,3.909 2.12,3.909 ; v1(1.554,4.2) v1(2.12,4.2) ; v1(1.554,4.2) 1.554,4.491 ; 1.554,4.491 v1(1.554,4.781) v1(2.12,4.781) v1(2.686,4.781) 2.686,4.491 ; 1.554,4.491 2.686,4.491 ; 1.614,33.839 v1(1.614,34.13) ; 1.614,33.839 v1(1.614,33.549) v1(2.18,33.549) ; 1.614,33.839 2.18,33.839 ; v1(1.614,34.13) v1(2.18,34.13) ; v1(1.614,34.13) 1.614,34.421 ; 1.614,34.421 v1(1.614,34.711) v1(2.18,34.711) v1(2.746,34.711) 2.746,34.421 ; 1.614,34.421 2.746,34.421 ; v1(2.12,3.619) v1(2.686,3.619) 2.686,3.909 ; v1(2.12,3.619) 2.12,3.909 ; 2.12,3.909 v1(2.12,4.2) ; 2.12,3.909 2.686,3.909 ; v1(2.12,4.2) v1(2.686,4.2) ; v1(2.18,33.549) v1(2.746,33.549) 2.746,33.839 ; v1(2.18,33.549) 2.18,33.839 ; 2.18,33.839 v1(2.18,34.13) ; 2.18,33.839 2.746,33.839 ; v1(2.18,34.13) v1(2.746,34.13) ; 2.686,3.909 v1(2.686,4.2) ; v1(2.686,4.2) 2.686,4.491 ; 2.746,33.839 v1(2.746,34.13) ; v1(2.746,34.13) 2.746,34.421 ; 22.274,33.649 22.84,33.649 ; 22.274,33.649 v1(22.274,33.359) v1(22.84,33.359) ; 22.274,33.649 v1(22.274,33.94) ; v1(22.274,33.94) 22.274,34.231 ; v1(22.274,33.94) v1(22.84,33.94) ; 22.274,34.231 23.406,34.231 ; 22.274,34.231 v1(22.274,34.521) v1(22.84,34.521) v1(23.406,34.521) 23.406,34.231 ; 22.694,4.039 23.26,4.039 ; 22.694,4.039 v1(22.694,3.749) v1(23.26,3.749) ; 22.694,4.039 v1(22.694,4.33) ; v1(22.694,4.33) 22.694,4.621 ; v1(22.694,4.33) v1(23.26,4.33) ; 22.694,4.621 23.826,4.621 ; 22.694,4.621 v1(22.694,4.911) v1(23.26,4.911) v1(23.826,4.911) 23.826,4.621 ; v1(22.84,33.359) 22.84,33.649 ; v1(22.84,33.359) v1(23.406,33.359) 23.406,33.649 ; 22.84,33.649 23.406,33.649 ; 22.84,33.649 v1(22.84,33.94) ; v1(22.84,33.94) v1(23.406,33.94) ; v1(23.26,3.749) 23.26,4.039 ; v1(23.26,3.749) v1(23.826,3.749) 23.826,4.039 ; 23.26,4.039 23.826,4.039 ; 23.26,4.039 v1(23.26,4.33) ; v1(23.26,4.33) v1(23.826,4.33) ; 23.406,33.649 v1(23.406,33.94) ; v1(23.406,33.94) 23.406,34.231 ; 23.826,4.039 v1(23.826,4.33) ; v1(23.826,4.33) 23.826,4.621
  Top Layer w0.556: v1(7.322,33.926) 7.916,33.926 8.316,34.326 U102.2
  Top Layer w0.762: U101.2 19.635,15.915 20.175,16.455 C102.2
  Top Layer w1: C101.2 20.173,18.497 C102.2
  Bottom Layer w0.254: TP206.1 1.013,26.235 1.013,26.766 v1(1.021,26.774)
  other v1: 6.095,15.58 4.66,22.63 5.79,22.63 6.89,22.63 4.66,23.76 5.79,23.76 6.89,23.76 5.79,24.86 6.89,24.86 8.382,31.802 12.946,33.945 16.755,38.48
I2C1_SCA: TP222.1 U201.30 U203.4 U206.3 | length 18.7
  Top Layer w0.127: U201.30@5.04,26.11 5.04,29.15 5.723,29.833 7.603,29.833 8.178,30.408 9.692,30.408 9.887,30.213 10.383,30.213 11.004,30.834 12.074,30.834 13.96,32.72 13.96,34.84 14.44,35.32 14.44,36.268 v1(15.045,36.872) U203.4
I2C1_SCL: TP221.1 U201.29 U203.5 U206.1 | length 17.7
  Top Layer w0.127: U201.29@5.54,26.11 5.54,28.93 6.189,29.579 7.714,29.579 8.185,29.108 9.132,29.108 9.228,29.203 9.732,29.203 11.109,30.58 12.29,30.58 14.24,32.53 14.24,34.66 14.515,34.935 14.765,34.935 15.045,34.655 v1(15.045,34.002) U203.5
  Bottom Layer w0.127: TP221.1@15.045,33.982 v1(15.045,34.002)
I2C1_WP: TP220.1 U201.28 U206.5 | length 4.9
  Top Layer w0.127: U201.28@6.04,26.11 v1(6.04,26.78) 6.04,28.67 6.478,29.108 U206.5@7.032,29.108
  Bottom Layer w0.127: TP220.1 5.164,26.986 5.73,26.986 5.937,26.78 v1(6.04,26.78)
LAMP_Onoff: TP208.1 U102.4 U201.11 | length 18.4
  Top Layer w0.127: v1(5.04,20.57) U201.11 U201.11@5.04,21.41
  Bottom Layer w0.127: v1(5.04,20.57) 5.119,20.57 5.305,20.385 5.856,20.385 6.16,20.08 6.775,20.08 8.29,21.596 8.29,22.87 8.726,23.306 9.172,23.306 9.446,23.58 9.446,26.176 9.682,26.412 9.682,27.218 9.484,27.416 9.484,30.684 10.23,31.43 10.23,32.213 v1(11.393,33.376)
LED_STATUS: D201.2 U201.12 | length 2.5
  Top Layer w0.127: D201.2 4.87,19.166 4.87,19.771 5.54,20.441 U201.12@5.54,21.41
MCU_BOOT: R206.2 U201.31 | length 2.8
  Top Layer w0.127: R206.2 2.579,26.882 4.328,26.882 4.54,26.669 U201.31@4.54,26.11
MCU_RESET: R205.2 TP218.1 U201.4 | length 1.7
  Top Layer w0.127: v1(2.455,24.243) 2.455,24.222 2.667,24.01 U201.4@3.44,24.01
  Bottom Layer w0.127: v1(2.455,24.243) TP218.1
NetC210_2: C210.2 D202.C R208.2 U205.3 | length 8
  Top Layer w0.254: D202.C R208.2 C210.2 U205.3
NetD201_1: D201.1 R203.1 | length 1.6
  Top Layer w0.127: D201.1 5.338,17.892 5.73,17.5 R203.1
NetJ3_1: J3.1 J3.2 J3.3 R1.2 | length 6.5
  Top Layer w0.556: J3.3 J3.2 J3.1 5.11,37.27 5.79,37.95 R1.2
NetR209_2: R209.2 R210.1 U204.3 | length 2.5
  Top Layer w0.254: U204.3 17.772,25.824 17.874,25.722 ; R209.2 17.874,26.275 17.874,25.722 ; R210.1 17.874,25.722
PD_Internal: C210.1 R208.1 TP223.1 U204.1 U205.4 | length 14
  Top Layer w0.254: v1(15.25,24.54) U204.1 ; R208.1 17.65,21.09 17.75,21.19 19.06,21.19 19.63,20.62 v1(20.48,20.62)
  Bottom Layer w0.254: v1(15.25,24.54) 15.25,23.52 16.16,22.61 18.49,22.61 v1(20.48,20.62)
RE_C: J4.2 K1.3 | length 10.3
  Top Layer w1: K1.3 11.79,6.46 13.14,5.11 J4.2
RE_NC: J4.3 K1.2 | length 7.4
  Top Layer w0.762: K1.2 14.009,7.956 14.009,6.841 14.579,6.271 19.24,6.271 19.31,6.341 19.971,6.341 J4.3
RE_NO: J4.1 K1.4 | length 13.2
  Top Layer w1: K1.4 9.59,6.03 11.76,3.86 J4.1
RS485_A: J1.4 R204.2 U202.6 | length 12.4
  Top Layer w0.127: v1(1.503,14.039) 1.88,14.416 U202.6
  Bottom Layer w0.127: v1(1.503,14.039) 2.103,13.44 2.103,7.497 3.992,5.608 4.542,5.608 v1(5.04,5.11)
RS485_B: J1.3 R204.1 U202.7 | length 12
  Top Layer w0.127: U202.7 2.53,14.463 v1(2.953,14.039)
  Bottom Layer w0.127: v1(2.953,14.039) 2.357,13.443 2.357,7.602 4.097,5.862 4.542,5.862 v1(5.04,6.36)
SYS_JTCK-SWCLK: TP210.1 U201.24 | length 12.8
  Top Layer w0.127: U201.24@8.14,25.51 v1(8.14,26.72)
  Bottom Layer w0.127: TP210.1 1.92,29.177 1.92,30.4 2.516,30.996 4.695,30.996 8.14,27.551 v1(8.14,26.72) 8.213,26.647 8.412,26.647
SYS_JTDI: TP212.1 U201.25 | length 7.2
  Top Layer w0.127: U201.25@7.54,26.11 v1(7.54,27.32)
  Bottom Layer w0.127: TP212.1 5.034,30.298 7.54,27.792 v1(7.54,27.32)
SYS_JTDO-SWO: TP213.1 U201.26 | length 10.4
  Top Layer w0.127: U201.26@7.04,26.11 U201.26 v1(7.04,26.82)
  Bottom Layer w0.127: TP213.1 2,27.267 2,28.47 2.79,29.26 5.712,29.26 7.04,27.932 v1(7.04,26.82)
SYS_JTMS-SWDIO: TP209.1 U201.23 | length 12.7
  Top Layer w0.127: U201.23@8.14,25.01 8.656,25.01 8.89,25.244 v1(8.89,26.74)
  Bottom Layer w0.127: TP209.1 1.958,31.25 4.8,31.25 8.866,27.184 8.866,26.764 v1(8.89,26.74)
SYS_NJTRST: TP215.1 U201.27 | length 5.1
  Top Layer w0.127: U201.27@6.54,26.11 v1(6.54,27.32)
  Bottom Layer w0.127: TP215.1 5.598,28.262 v1(6.54,27.32)
TurnON: J4.4 TP211.1 U103.4 U201.13 | length 30.9
  Top Layer w0.127: v1(5.68,19.89) 5.68,19.908 6.03,20.258 6.03,21.4 U201.13@6.04,21.41
  Bottom Layer w0.127: v1(5.68,19.89) 5.68,18.84 3.83,16.99 3.83,13.41 7.031,10.209 TP211.1 10.306,8.7 13.606,8.7 14.317,9.412 14.317,10.899 15.035,11.616 15.078,11.616 15.222,11.76 15.222,11.803 19.415,7.61 v1(19.99,7.61)
  other v1: 15.295,11.73
USART1_RXD: TP214.1 U201.19 | length 4.1
  Top Layer w0.127: U201.19@8.199,22.951 8.737,22.951 8.827,22.862 v1(8.93,22.862)
  Bottom Layer w0.127: v1(8.93,22.862) 8.964,22.828 9.378,22.828 9.7,23.15 9.7,24.837 TP214.1
USART1_TXD: TP216.1 U201.20 | length 2.9
  Top Layer w0.127: U201.20@8.14,23.51 8.532,23.51 8.7,23.678 8.915,23.678 v1(8.988,23.751)
  Bottom Layer w0.127: TP216.1 9.14,24.64 9.14,24.129 9.14,24.006 8.988,23.854 v1(8.988,23.751)
USART2_DE: TP203.1 U201.7 U202.2 U202.3 | length 8.3
  Top Layer w0.127: v1@2.707,21.702 2.707,22.175 3.019,22.487 U201.7@3.417,22.487
  Top Layer w0.254: U202.3 1.88,18.645 v1(2.205,18.32) 2.53,18.645 U202.2 ; v1(2.658,21.654) v1@2.707,21.702
  Bottom Layer w0.254: v1(2.205,18.32) 2.205,21.201 v1(2.658,21.654)
USART2_RXD: TP205.1 U201.9 U202.1 | length 2.2
  Top Layer w0.127: v1(3.18,19.88) 3.18,21.04 3.55,21.41 U201.9@4.04,21.41
USART2_TXD: TP204.1 U201.8 U202.4 | length 3.8
  Top Layer w0.127: v1(1.23,19.88) 1.23,20.78 1.46,21.01 2.75,21.01 3.44,21.7 U201.8@3.44,22.01
Va: R207.1 R209.1 U204.4 | length 2.7
  Top Layer w0.254: R207.1 U204.4 16.555,27.739 R209.1
VDDA: C204.1 L201.2 U201.5 | length 3.3
  Top Layer w0.254: C204.1 2.236,22.362 2.068,22.195 ; C204.1@2.264,22.926 2.848,23.51 U201.5@3.44,23.51 ; 2.068,22.195 1.89,22.017 L201.2 2.068,21.935 2.068,22.195
pads on no net: FID1. J1.2 J1.S1 J1.S2 J2.S1 J2.S2 J3.S1 J3.S2 J4.S1 J4.S2 K1.5 K1.6 K1.7 U101.3 U102.3 U103.3 U201.2 U201.3 U201.6 U201.18 U201.21 U201.22 U204.5 U205.5

## Polygon pours and split planes (outlines as drawn)
+3.3VD on PWR "3V" (solid, pour order 0): 0,0 0,40 25,40 25,0
DGND on Bottom Layer "DGND" (solid, pour order 1): 0,0 0,40 25,40 25,0
DGND on GND "DGND" (solid, pour order 2): 0,0 0,40 25,40 25,0
DGND on Top Layer "DGND" (solid, pour order 3): 0,0 0,40 25,40 25,0

## Keep-outs
Keep-Out Layer:
  the board outline again, w0.254

## Silkscreen, mask and mechanical layers (free items; w line width, h text height)
Top Overlay:
  the board outline again, w0.1
Bottom Overlay:
  drawing of 6 lines, arcs and shapes, not listed
  text "Universal Utilities" at 22.689,4.12 h5.08
  text ".PCB_PN" at 22.357,2.653 h0.6
  text "PN :" at 24.41,2.653 h0.6
  text "GROUP" at 16.084,2.213 h3.4
  text ".PCB_Rev" at 22.346,1.647 h0.6
  text "RV :" at 24.4,1.647 h0.6
  text "MO :" at 24.41,0.625 h0.6
  text ".PCB_Name" at 22.228,0.596 h0.6
Mechanical 1:
  lines w0.1: 0,0 9.5,0 9.5,15 ; 7.35,15 9.5,15 ; 11.65,15 9.5,15 ; 1.438,13.655 1.438,11.655 3.438,11.655 3.438,13.655 ; 1.438,13.655 3.438,13.655 ; 1.438,13.655 1.438,15.655 ; 1.438,15.655 1.438,17.655 3.438,17.655 3.438,15.655 ; 1.438,15.655 3.438,15.655 ; 3.438,13.655 3.438,15.655